# EAGLE board OCTOBOARDV_1.1 (EAGLE 9.5.1)
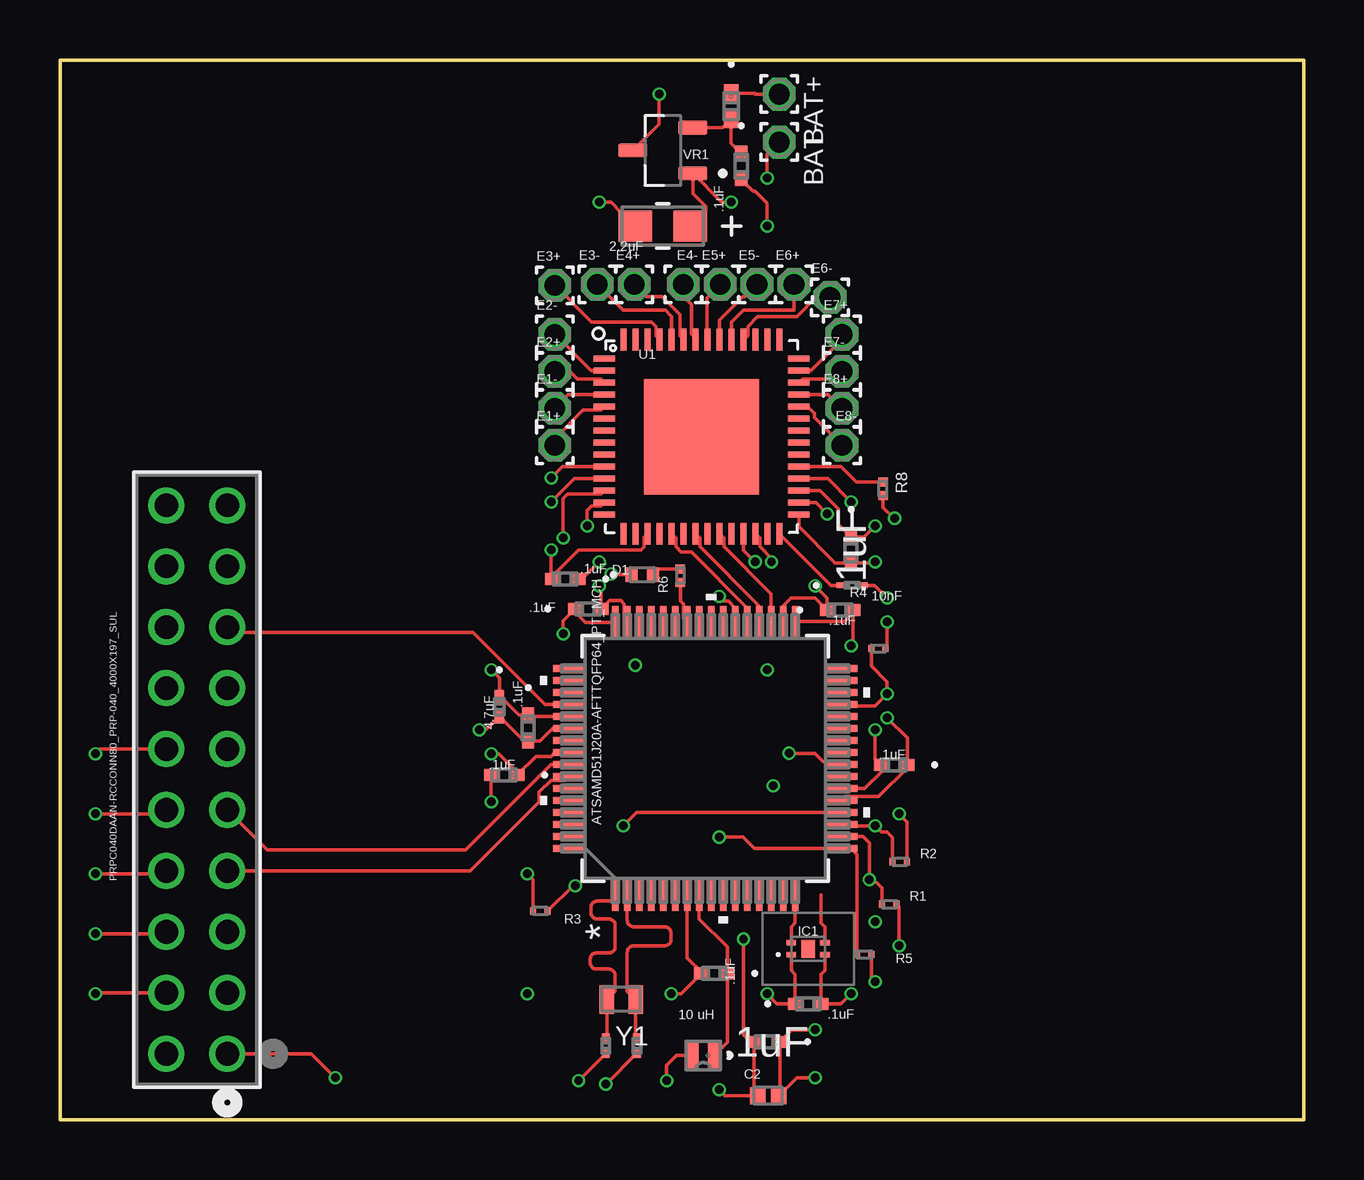
[diagram p0: board, top side]
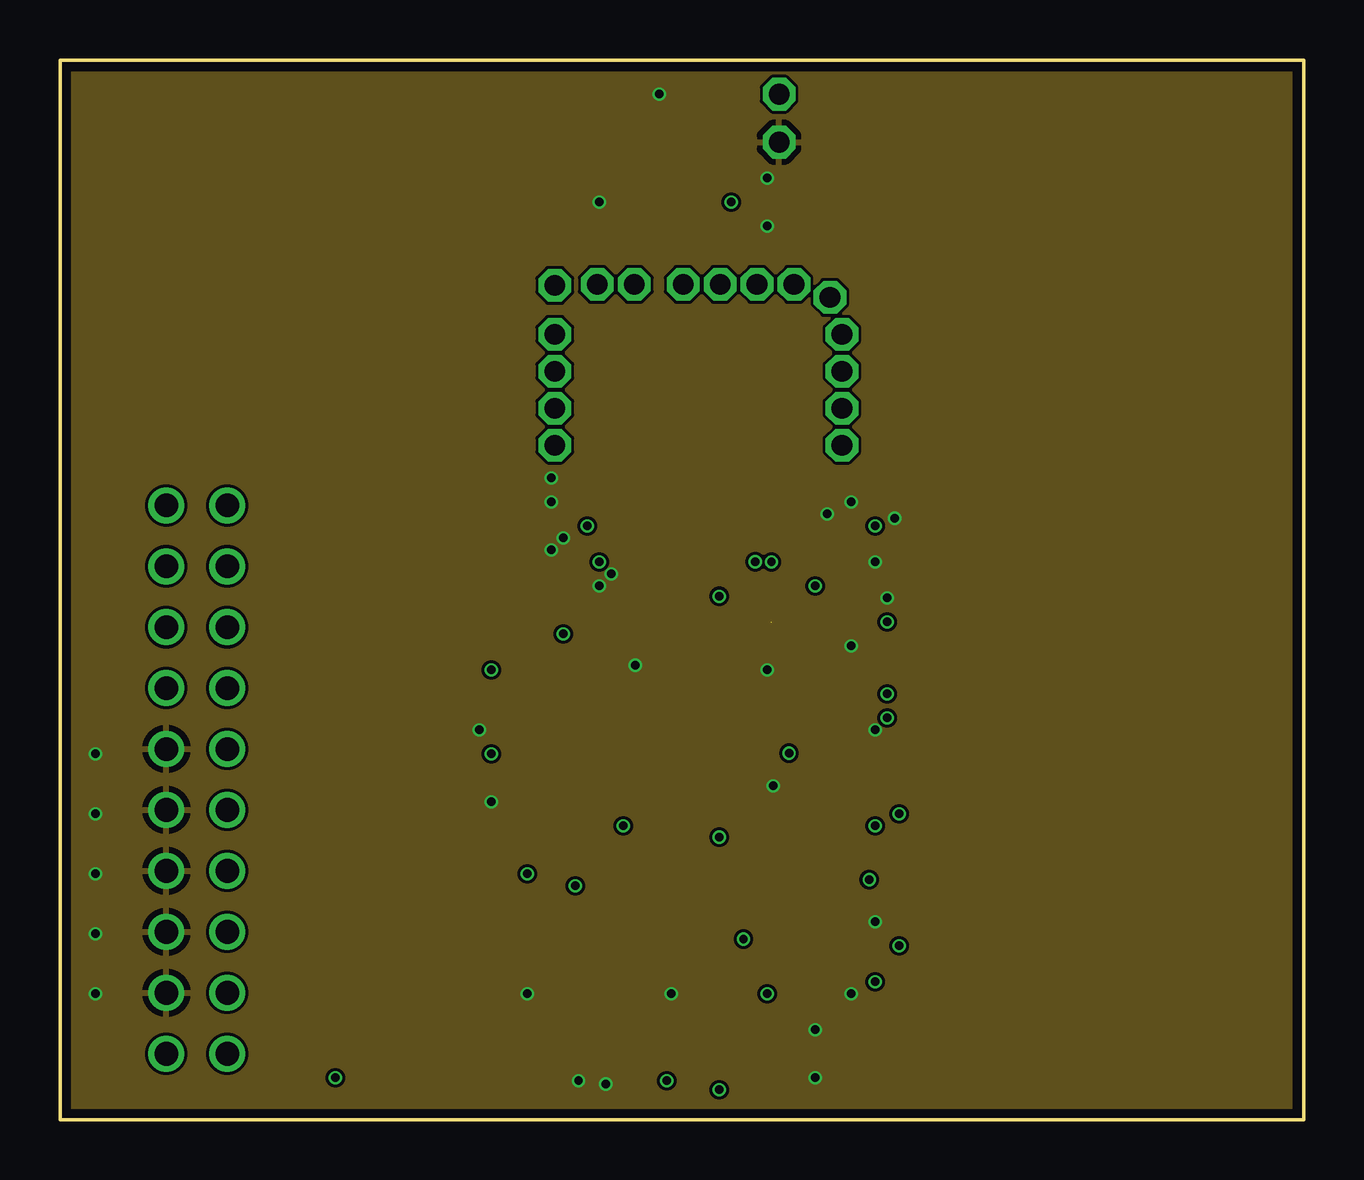
[diagram p1: board, inner layer Route2]
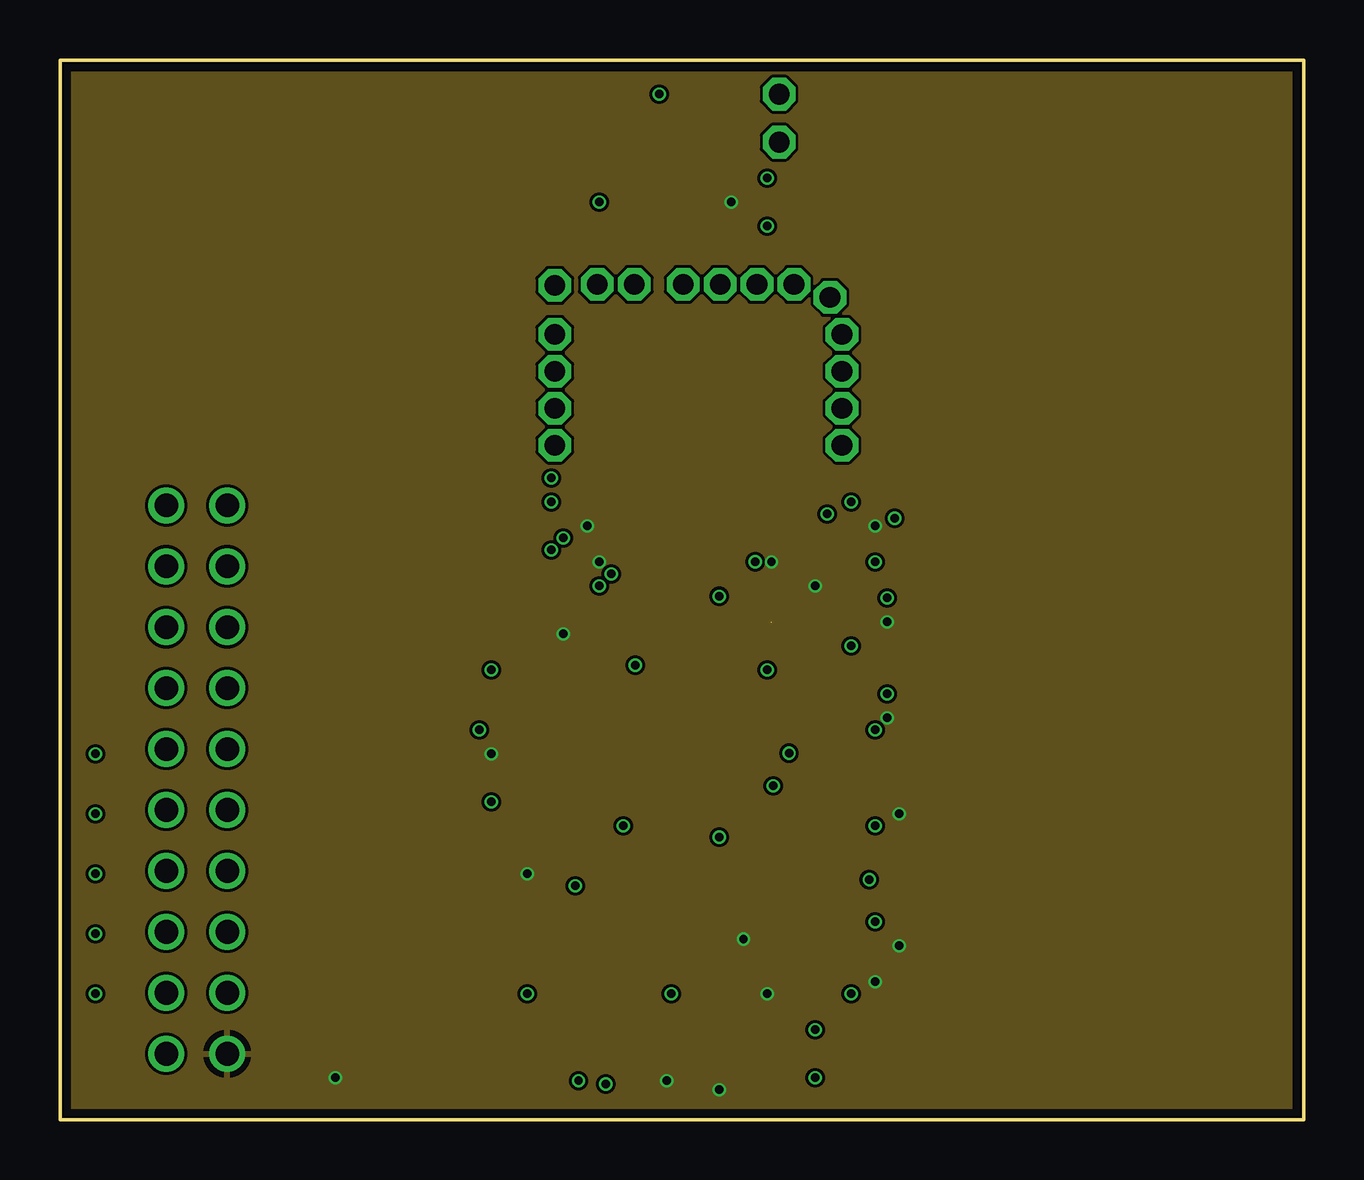
[diagram p2: board, inner layer Route15]
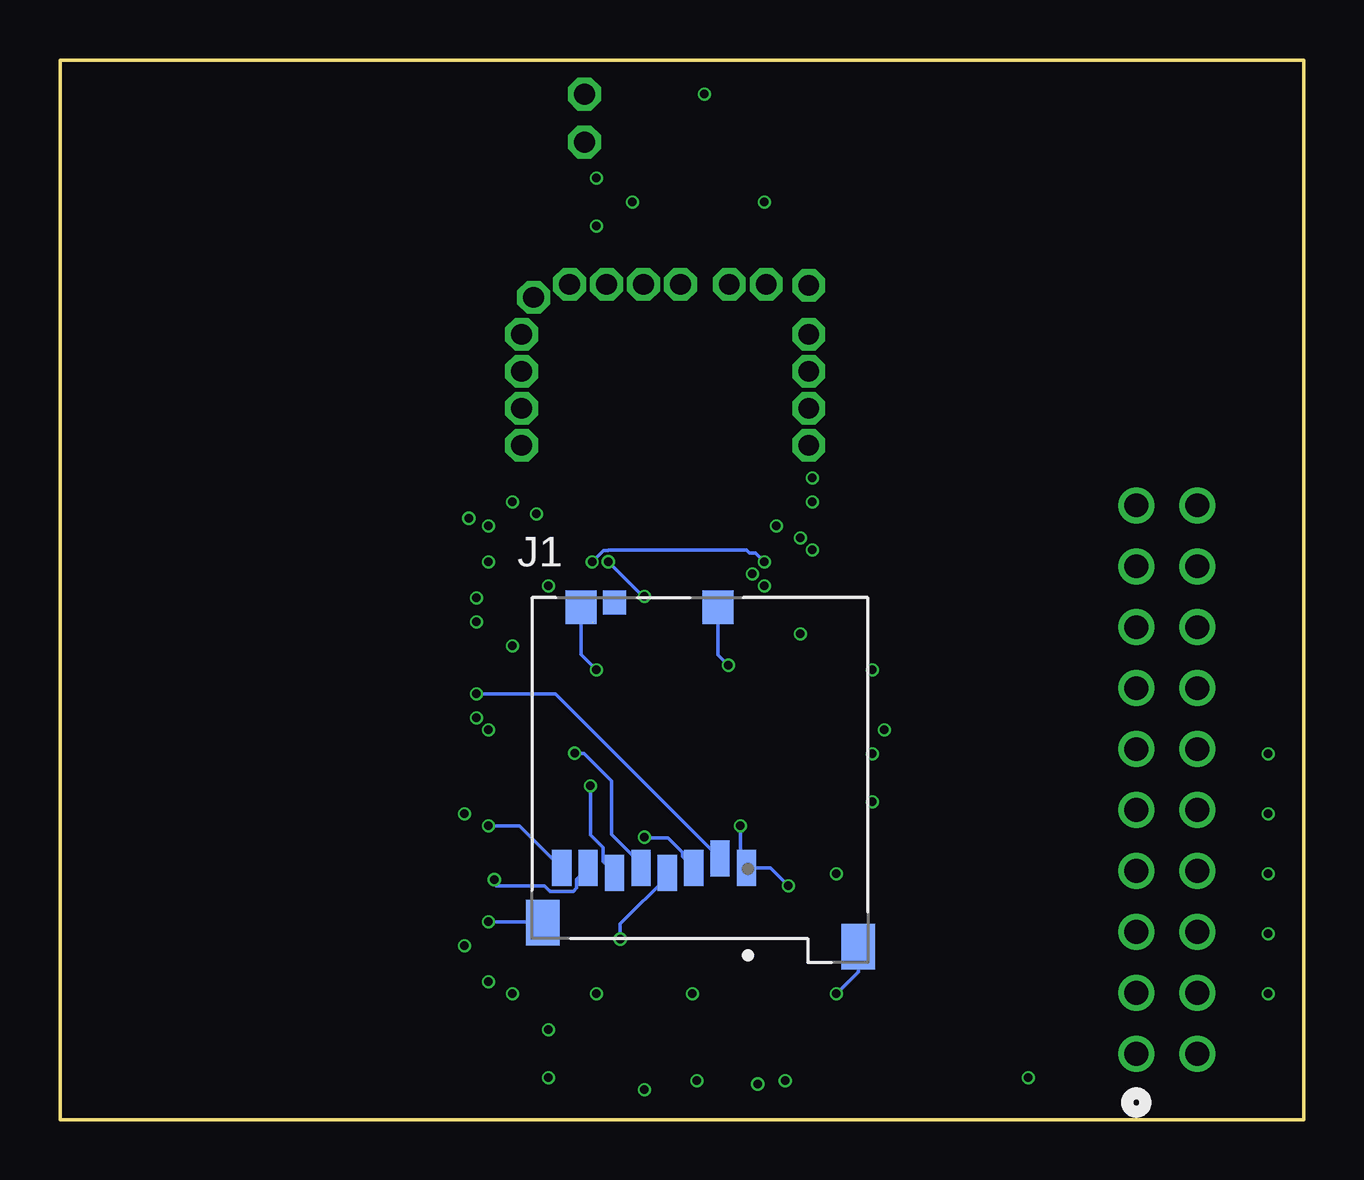
[diagram p3: board, bottom side, seen from below]

Size 51.84 x 44.17 mm. Coordinates in mm from the lower left corner, seen from the top.
Outline: 0,0 0,44.17 51.84,44.17 51.84,0 0,0
Copper layers (1*2*15*16): Top 0.035559375mm / dielectric 0.17018125mm / Route2 0.01778125mm / dielectric 47mil / Route15 0.01778125mm / dielectric 0.17018125mm / Bottom 0.035559375mm
Design rules "oshpark-4layer": minimum track width 5mil, minimum drill 10mil, track to track 5mil, track to pad 5mil, pad to pad 5mil, via to via 5mil, smd to smd 5mil, copper to edge 15mil, drill to drill 6mil, minimum pad ring 4mil, minimum via ring 4mil, stop-mask expansion 1.5mil, vias tented up to drill 0mil, thermal gap 10mil

## Footprints (pad centres in the part's own frame; a part is rotated, then mirrored left to right if it is on the bottom)
1,6/0,9 = drill 0.86 pad 1.36 octagon: 1 0,0
CAP_0402_WAL = smd 0.604 x 0.508: 1 -0.543,0; 2 0.543,0
CAPC1005X70N = smd 0.64 x 0.72: 1 -0.439,0; 2 0.439,0
CAPMP3.4X1.6_1.8N_KEM = smd 1.399 x 1.3: 1 -1.151,0; 2 1.151,0
CAP_00J25AH_AVX = smd 0.502 x 0.229: 1 -0.404,0; 2 0.404,0
CAPC6333_33N_KEM = smd 0.43 x 0.33: 1 -0.3,0; 2 0.3,0
CAP_CM03_F_KAV = smd 0.579 x 0.381: 1 -0.404,0; 2 0.404,0
LED_SML-P11UTT86R = smd 0.5 x 0.6: A 0.45,0; C -0.45,0
0402_AVX = smd 0.756 x 0.61: 1 -0.531,0; 2 0.531,0
MHA100KN = smd 0.4 x 0.22: 1 -0.7,-0.25; 2 0.7,-0.25; 3 0.7,0.25; 4 -0.7,0.25 | smd 0.55 x 0.75: 5 0,0
MOLEX_47352-1001 = smd 0.8 x 1.5: 1 1.94,-3.66; 2 0.84,-3.26; 3 -0.26,-3.66; 4 -1.36,-3.86; 5 -2.46,-3.66; 6 -3.56,-3.86; 7 -4.66,-3.66; 8 -5.76,-3.66 | smd 1.3 x 1.4: S1 -4.95,7.2; S2 0.75,7.2 | smd 1.4 x 1.9: S3 -6.55,-5.95; S4 6.6,-6.95 | smd 0.95 x 1: SW -3.56,7.4
CONN80_PRP-040_4000X197_SUL = drill 0.991 pad 1.499: 1 0,0; 2 -2.54,0; 3 -5.08,0; 4 -7.62,0; 5 -10.16,0; 6 -12.7,0; 7 -15.24,0; 8 -17.78,0; 9 -20.32,0; 10 -22.86,0; 11 0,-2.54; 12 -2.54,-2.54; 13 -5.08,-2.54; 14 -7.62,-2.54; 15 -10.16,-2.54; 16 -12.7,-2.54; 17 -15.24,-2.54; 18 -17.78,-2.54; 19 -20.32,-2.54; 20 -22.86,-2.54
IND_SDEB12101T_CYN = smd 0.508 x 1.194: 1 -0.45,0; 2 0.45,0
RES_ERJ1GNJ104C = smd 0.25 x 0.3: 1 -0.3,0; 2 0.3,0
RES_ERJ-1RHD1002C = smd 0.25 x 0.3: 1 -0.3,0; 2 0.3,0
RESC0603X26N = smd 0.38 x 0.4: 1 -0.281,0; 2 0.281,0
QFN56_8_X_8_LARGE = smd 0.9 x 0.25: 1 -4.05,3.25; 2 -4.05,2.75; 3 -4.05,2.25; 4 -4.05,1.75; 5 -4.05,1.25; 6 -4.05,0.75; 7 -4.05,0.25; 8 -4.05,-0.25; 9 -4.05,-0.75; 10 -4.05,-1.25; 11 -4.05,-1.75; 12 -4.05,-2.25; 13 -4.05,-2.75; 14 -4.05,-3.25; 29 4.05,-3.25; 30 4.05,-2.75; 31 4.05,-2.25; 32 4.05,-1.75; 33 4.05,-1.25; 34 4.05,-0.75; 35 4.05,-0.25; 36 4.05,0.25; 37 4.05,0.75; 38 4.05,1.25; 39 4.05,1.75; 40 4.05,2.25; 41 4.05,2.75; 42 4.05,3.25 | smd 0.25 x 0.9: 15 -3.25,-4.05; 16 -2.75,-4.05; 17 -2.25,-4.05; 18 -1.75,-4.05; 19 -1.25,-4.05; 20 -0.75,-4.05; 21 -0.25,-4.05; 22 0.25,-4.05; 23 0.75,-4.05; 24 1.25,-4.05; 25 1.75,-4.05; 26 2.25,-4.05; 27 2.75,-4.05; 28 3.25,-4.05; 43 3.25,4.05; 44 2.75,4.05; 45 2.25,4.05; 46 1.75,4.05; 47 1.25,4.05; 48 0.75,4.05; 49 0.25,4.05; 50 -0.25,4.05; 51 -0.75,4.05; 52 -1.25,4.05; 53 -1.75,4.05; 54 -2.25,4.05; 55 -2.75,4.05; 56 -3.25,4.05 | smd 4.8 x 4.8: CENTER 0,0
TQFP64_PT_MCH = smd 1.346 x 0.279: 1 -5.677,3.75; 2 -5.677,3.25; 3 -5.677,2.75; 4 -5.677,2.25; 5 -5.677,1.75; 6 -5.677,1.25; 7 -5.677,0.75; 8 -5.677,0.25; 9 -5.677,-0.25; 10 -5.677,-0.75; 11 -5.677,-1.25; 12 -5.677,-1.75; 13 -5.677,-2.25; 14 -5.677,-2.75; 15 -5.677,-3.25; 16 -5.677,-3.75; 33 5.677,-3.75; 34 5.677,-3.25; 35 5.677,-2.75; 36 5.677,-2.25; 37 5.677,-1.75; 38 5.677,-1.25; 39 5.677,-0.75; 40 5.677,-0.25; 41 5.677,0.25; 42 5.677,0.75; 43 5.677,1.25; 44 5.677,1.75; 45 5.677,2.25; 46 5.677,2.75; 47 5.677,3.25; 48 5.677,3.75 | smd 0.279 x 1.346: 17 -3.75,-5.677; 18 -3.25,-5.677; 19 -2.75,-5.677; 20 -2.25,-5.677; 21 -1.75,-5.677; 22 -1.25,-5.677; 23 -0.75,-5.677; 24 -0.25,-5.677; 25 0.25,-5.677; 26 0.75,-5.677; 27 1.25,-5.677; 28 1.75,-5.677; 29 2.25,-5.677; 30 2.75,-5.677; 31 3.25,-5.677; 32 3.75,-5.677; 49 3.75,5.677; 50 3.25,5.677; 51 2.75,5.677; 52 2.25,5.677; 53 1.75,5.677; 54 1.25,5.677; 55 0.75,5.677; 56 0.25,5.677; 57 -0.25,5.677; 58 -0.75,5.677; 59 -1.25,5.677; 60 -1.75,5.677; 61 -2.25,5.677; 62 -2.75,5.677; 63 -3.25,5.677; 64 -3.75,5.677
SOT95P280X110-3N = smd 1.21 x 0.59: 1 -1.255,0.95; 2 -1.255,-0.95; 3 1.255,0
XTAL_CM9V-T1A-32.768KHZ-9PF-20PPM-TA-QC = smd 0.6 x 1.2: 1 -0.6,0; 2 0.6,0

## Placement (x,y rotation side)
BAT+  [1,6/0,9]  29.98,42.75 270 top
BAT-  [1,6/0,9]  29.98,40.75 270 top
C1  .1uF  [CAP_0402_WAL]  29.48,3.25 180 top
C2  10uF  [CAPC1005X70N]  29.52,1 0 top
C3  .1uF  [CAP_0402_WAL]  28.4,39.75 270 top
C4  .1uF  [CAP_0402_WAL]  31.19,4.83 0 top
C5  2.2uF  [CAPMP3.4X1.6_1.8N_KEM]  25.12,37.25 180 top
C6  10nF  [CAP_00J25AH_AVX]  33.02,22.27 0 top
C7  .1uF  [CAP_0402_WAL]  21.07,22.54 180 top
C8  .1uF  [CAP_0402_WAL]  34.77,14.79 180 top
C9  .1uF  [CAP_0402_WAL]  32.98,23.75 270 top
C10  .1uF  [CAP_0402_WAL]  18.52,14.37 180 top
C11  CBR02C130F3GACCAPC6333_33N_KEM  [CAPC6333_33N_KEM]  22.75,3.09 90 top
C12  .1uF  [CAP_0402_WAL]  19.52,16.33 270 top
C13  4.7uF  [CAP_CM03_F_KAV]  18.32,17.22 270 top
C14  .1uF  [CAP_0402_WAL]  22.02,21.29 0 top
C15  CBR02C130F3GACCAPC6333_33N_KEM  [CAPC6333_33N_KEM]  24.05,3.09 90 top
C16  .1uF  [CAP_0402_WAL]  32.52,21.25 0 top
C18  .1uF  [CAP_0402_WAL]  27.27,6.1 180 top
D1  SML-P11UTT86R  [LED_SML-P11UTT86R]  24.27,22.72 0 top
E1+  [1,6/0,9]  20.62,28.12 0 top
E1-  [1,6/0,9]  20.62,29.66 0 top
E2+  [1,6/0,9]  20.62,31.2 0 top
E2-  [1,6/0,9]  20.62,32.74 0 top
E3+  [1,6/0,9]  20.62,34.78 0 top
E3-  [1,6/0,9]  22.4,34.82 0 top
E4+  [1,6/0,9]  23.94,34.82 0 top
E4-  [1,6/0,9]  25.98,34.82 0 top
E5+  [1,6/0,9]  27.52,34.82 0 top
E5-  [1,6/0,9]  29.05,34.82 0 top
E6+  [1,6/0,9]  30.6,34.82 0 top
E6-  [1,6/0,9]  32.1,34.28 0 top
E7+  [1,6/0,9]  32.6,32.74 0 top
E7-  [1,6/0,9]  32.6,31.2 0 top
E8+  [1,6/0,9]  32.6,29.66 0 top
E8-  [1,6/0,9]  32.6,28.12 0 top
FUSE28MA  F0402G0R02FNTR0402_AVX  [0402_AVX]  27.98,42.25 270 top
IC1  MHA100KN  [MHA100KN]  31.19,7.13 0 top
J1  47352-1001  [MOLEX_47352-1001]  25.16,14.16 0 bottom
J2  PRPC040DAAN-RCCONN80_PRP-040_4000X197_SUL  [CONN80_PRP-040_4000X197_SUL]  6.98,2.75 270 top
L1  10 uH  [IND_SDEB12101T_CYN]  26.82,2.68 180 top
R1  100k  [RES_ERJ1GNJ104C]  34.57,8.99 0 top
R2  100k  [RES_ERJ1GNJ104C]  35.01,10.76 0 top
R3  100k  [RES_ERJ1GNJ104C]  20.02,8.7 180 top
R4  100k  [RES_ERJ1GNJ104C]  34.12,19.65 0 top
R5  10k  [RES_ERJ-1RHD1002C]  33.52,6.89 0 top
R6  3.3k  [RESC0603X26N]  25.86,22.68 90 top
R8  0Ohm  [RESC0603X26N]  34.3,26.3 270 top
U1  RHD2216_QFN  [QFN56_8_X_8_LARGE]  26.74,28.47 0 top
U3  ATSAMD51J20A-AFTTQFP64_PT_MCH  [TQFP64_PT_MCH]  26.9,15.06 90 top
VR1  TS5204CX33_RFG  [SOT95P280X110-3N]  25.12,40.4 180 top
Y1  CM9V-T1A-32.768KHZ-9PF-20PPM-TA-QC  [XTAL_CM9V-T1A-32.768KHZ-9PF-20PPM-TA-QC]  23.4,5.01 180 top

## Library data of the parts
BAT+ BAT- E1+ E1- E2+ E2- E3+ E3- E4+ E4- E5+ E5- E6+ E6- E7+ E7- E8+ E8- = wirepadedit
C1 C3 C4 C7-C10 C12 C14 C16 C18 = 01uFCap; COPYRIGHT: Copyright (C) 2023 Ultra Librarian. All rights reserved.; MANUFACTURER_PART_NUMBER: 0402B104K250CT; MFR_NAME: Walsin
C2 = 10uFCap; AVAILABILITY: In Stock; DESCRIPTION: SMD capacitor X5R(EIA) with capacitance 10uF Tol.20%. Rated voltage 10Vdc 85C; MF: Murata Electronics; MP: GRM155R61A106ME11D; PACKAGE: 1005 Murata; PRICE: None; PURCHASE-URL: https://pricing.snapeda.com/search/part/GRM155R61A106ME11D/?ref=eda
C5 = 2_2uFCap; COPYRIGHT: Copyright (C) 2023 Ultra Librarian. All rights reserved.; MANUFACTURER_PART_NUMBER: T491A225K016ATAUTO; MFR_NAME: Kemet
C6 = 10nFCap; COPYRIGHT: Copyright (C) 2023 Ultra Librarian. All rights reserved.; MANUFACTURER_PART_NUMBER: CM02X5R103M16AH; MFR_NAME: KYOCERA AVX
C11 C15 = 13pFCap; COPYRIGHT: Copyright (C) 2023 Ultra Librarian. All rights reserved.; MANUFACTURER_PART_NUMBER: CBR02C130F3GAC; MFR_NAME: Kemet
C13 = 4_7uFCap0603; COPYRIGHT: Copyright (C) 2023 Ultra Librarian. All rights reserved.; MANUFACTURER_PART_NUMBER: CM03X5R475M06AH055; MFR_NAME: KYOCERA AVX
D1 = SML_P11UTT86R; MANUFACTURER: ROHM Semiconductor; PARTREV: 007; STANDARD: Manufacturer Recommendation
FUSE28MA = fuse28mA; COPYRIGHT: Copyright (C) 2023 Ultra Librarian. All rights reserved.; MANUFACTURER_PART_NUMBER: F0402G0R20FNTR; MFR_NAME: KYOCERA AVX
IC1 = MHA100KN; DESCRIPTION: Board Mount Hall Effect / Magnetic Sensors High Performance Low Power Hall-Effect Sensor; HEIGHT: 0.42mm; MANUFACTURER_NAME: MEMSIC; MANUFACTURER_PART_NUMBER: MHA100KN; MOUSER_PART_NUMBER: 438-MHA100KN; MOUSER_PRICE-STOCK: https://www.mouser.co.uk/ProductDetail/MEMSIC/MHA100KN?qs=W%2FMpXkg%252BdQ6cWUMxnX3l5w%3D%3D
J1 = 47352-1001; DESCRIPTION: 8 (6 + 2) Position Card Connector Secure Digital - microSD™ Surface Mount, Right Angle Gold; DIGI-KEY_PART_NUMBER: WM3290CT-ND; MF: Molex; MP: 47352-1001; PACKAGE: None; PURCHASE-URL: https://pricing.snapeda.com/search/part/47352-1001/?ref=eda
J2 = Header; COPYRIGHT: Copyright (C) 2023 Ultra Librarian. All rights reserved.; MANUFACTURER_PART_NUMBER: PRPC040DAAN-RC; MFR_NAME: Sullins; TYPE: Headers, Male Pins
L1 = 10uH_inductor; COPYRIGHT: Copyright (C) 2023 Ultra Librarian. All rights reserved.; MANUFACTURER_PART_NUMBER: SDEB12101T-100MSD; MFR_NAME: Cyntec
R1-R4 = 100kRes; AVAILABILITY: In Stock; DESCRIPTION: 100 kOhms 5% 0.05W, 1/20W Chip Resistor 0201 (0603 Metric) Automotive AEC-Q200 Thick Film; MF: Panasonic; MP: ERJ-1GNJ104C; PACKAGE: 0603-2 Panasonic; PRICE: None; PURCHASE-URL: https://pricing.snapeda.com/search/part/ERJ-1GNJ104C/?ref=eda
R5 = 10kRes; AVAILABILITY: In Stock; DESCRIPTION: 10 kOhms ±0.5% 0.05W, 1/20W Chip Resistor 0201 (0603 Metric) - Thick Film; MF: Panasonic Electronic; MP: ERJ-1RHD1002C; PACKAGE: 201-2 Panasonic; PRICE: None; PURCHASE-URL: https://pricing.snapeda.com/search/part/ERJ-1RHD1002C/?ref=eda
R6 = 3_3kRes
R8 = RMCF0201ZT0R00; AVAILABILITY: In Stock; DESCRIPTION: 0 Ohms Jumper 0.05W, 1/20W Chip Resistor 0201 (0603 Metric) - Thick Film; MF: Stackpole Electronics Inc; MP: RMCF0201ZT0R00; PACKAGE: 0603 Rohm Semiconductor; PRICE: None; PURCHASE-URL: https://pricing.snapeda.com/search/part/RMCF0201ZT0R00/?ref=eda
U1 = RHD2000
U3 = ATSAMD51j20AAFT; COPYRIGHT: Copyright (C) 2023 Ultra Librarian. All rights reserved.; MANUFACTURER_PART_NUMBER: ATSAMD51J20A-AFT; MFR_NAME: Microchip
VR1 = TS5204CX33_RFG_VLTREG; AVAILABILITY: In Stock; DESCRIPTION: 80MA 3.3V ULTRA LOW DROPOUT VOLTAGE REGULATOR; MF: Taiwan Semiconductor Corporation; MP: TS5204CX33 RFG; PACKAGE: SOT-23-3 Taiwan Semiconductor; PRICE: None; PURCHASE-URL: https://pricing.snapeda.com/search/part/TS5204CX33 RFG/?ref=eda
Y1 = CM9V-T1A-32.768KHZ-9PF-20PPM-TA-QC; AVAILABILITY: In Stock; DESCRIPTION: LOW FREQUENCY CRYSTAL; MF: Micro Crystal AG; MP: CM9V-T1A-32.768KHZ-9PF-20PPM-TA-QC; PACKAGE: SMD-2 Micro Crystal; PRICE: None; PURCHASE-URL: https://pricing.snapeda.com/search/part/CM9V-T1A-32.768KHZ-9PF-20PPM-TA-QC/?ref=eda

## Nets
+3V3: C1.2 C2.1 C4.1 C5.1 C7.1 C8.1 C9.1 C10.1 C14.1 C16.1 IC1.1 J1.4 J2.1 L1.2 R1.2 R2.2 R3.2 R4.2 R5.2 U1.13 U1.26 U1.31 U3.21 U3.34 U3.48 U3.56 VR1.1
B+: BAT+.1 FUSE28MA.1
CS: U1.19 U3.37
CTR: U1.CENTER
EXT_INT: IC1.4 U3.16
GND: BAT-.1 C1.1 C2.2 C3.2 C4.2 C5.2 C6.2 C7.2 C8.2 C9.2 C10.2 C11.1 C12.2 C13.2 C14.2 C15.1 C16.2 C18.2 D1.C IC1.2 J1.6 J1.S1 J1.S2 J1.S3 J1.S4 J2.12 J2.13 J2.14 J2.15 J2.16 R8.2 U1.10 U1.11 U1.12 U1.17 U1.29 U1.30 U1.32 U3.7 U3.22 U3.33 U3.47 U3.54 VR1.3
N$1: C3.1 FUSE28MA.2 VR1.2
N$2: E2-.1 U1.2
N$3: E2+.1 U1.3
N$4: E1-.1 U1.4
N$5: E1+.1 U1.5
N$7: E3-.1 U1.52
N$8: E4+.1 U1.51
N$9: E4-.1 U1.50
N$10: E5+.1 U1.49
N$11: E5-.1 U1.48
N$12: E6+.1 U1.47
N$13: E7+.1 U1.41
N$14: E6-.1 U1.46
N$15: E7-.1 U1.40
N$16: E8+.1 U1.39
N$17: E8-.1 U1.38
N$18: R6.1 U3.42
N$19: C6.1 U1.28
N$20: R8.1 U1.33
N$21 [Test]: C11.2 U3.1 Y1.2
N$22: C12.1 C13.1 U3.53
N$23: C18.1 L1.1 U3.8
N$24: D1.A R6.2
N$25 [Test]: C15.2 U3.2 Y1.1
N$26: E3+.1 U1.53
NC: IC1.3
RESET: J2.8 U3.52
SD_CD/DATA3: J1.2 R4.1 U3.29
SDCLK: J1.5 U3.24
SDCMD: J1.3 R5.1 U3.17
SDDATA0: J1.7 R1.1 U3.18
SDDATA1: J1.8 R2.1 U3.19
SDDATA2: J1.1 R3.1 U3.20
SPI_MISO: U1.25 U3.38
SPI_MOSI: U1.23 U3.35
SPI_SCLK: U1.21 U3.36
SWDCLK: J2.5 U3.57
SWDIO: J2.4 U3.58
VSW: U3.55

## Tracks (layer width: path | path; a pad name or v marks a point on that pad's centre or on a via)
+3V3  (via drill 0.35)
  Top 0.152: U1.13 22.55,25.57 22.15,25.57 21.98,25.4 v21.98,24.75 | v33.98,24.75 33.52,24.29 C9.1 32.46,24.81 32.46,25.45 31.68,26.22 U1.31 | v20.98,20.25 20.98,20.79 C14.1 21.47,21.17 21.91,20.74 U3.48 | R1.2 34.98,8.88 v34.98,7.25 | R3.2 19.73,10 v19.48,10.25 | v34.48,20.75 34.48,19.71 R4.2 | v27.48,1.25 27.73,1 C2.1 28.93,1.15 C1.2 28.77,3.25 28.49,3.53 v28.49,7.53 | v25.29,1.62 25.29,2.28 25.69,2.68 L1.2 | v27.98,38.25 27.58,38.25 VR1.1 26.38,38.61 26.93,38.06 26.93,37.89 26.84,37.8 26.82,37.8 C5.1 | J2.1 10.48,2.75 v11.48,1.75 | IC1.1 30.49,6.22 30.65,6.06 30.65,4.88 C4.1 29.89,4.83 v29.48,5.25 | v31.48,22.25 31.97,21.75 C16.1 31.47,21.75 30.48,21.75 30.15,21.42 U3.34 | U1.26 29.17,24.25 29.17,23.89 29.66,23.39 v29.66,23.25 | v22.48,23.25 21.77,22.54 C7.1 | U3.56 20.62,15.31 20.46,15.15 19.84,15.15 C10.1 18.86,14.57 18.86,14.69 18.3,15.25 v17.98,15.25 | v34.48,16.75 35.32,15.91 C8.1 35.32,14.67 34.11,13.47 32.73,13.47 U3.21 | v33.98,5.75 33.82,5.9 R5.2 | v34.98,12.75 35.3,12.42 R2.2
  Bottom 0.152: J1.4 26.52,10.13 28.49,8.16 v28.49,7.53 | v29.66,23.25 29.46,23.45 29.18,23.73 28.99,23.73 28.98,23.75 23.22,23.75 23.1,23.63 22.85,23.63 v22.48,23.25
  pour Route15: 51.98,-0.25 -0.02,-0.25 -0.02,44.25 51.98,44.25
B+
  Top 0.152: FUSE28MA.1 28.94,42.78 28.98,42.75 BAT+.1
CS
  Top 0.152: U1.19 25.67,24.25 25.67,23.89 25.89,23.66 26.32,23.66 28.65,21.34 U3.37
EXT_INT
  Top 0.152: IC1.4 30.49,8.04 30.65,8.2 U3.16
GND  (via drill 0.35)
  Top 0.152: C3.2 28.9,38.71 28.98,38.71 29.48,38.21 v29.48,37.25 | VR1.3 24.98,41.51 v24.98,42.75 | v29.48,39.25 29.48,40.25 BAT-.1 | v20.48,26.75 20.95,27.22 U1.10 | U1.11 21.45,26.72 v20.48,25.75 | U1.12 22.55,26.07 21.15,26.07 20.98,25.9 v20.98,24.25 | v33.98,23.25 33.93,23.21 C9.2 32.31,23.21 30.79,24.72 U1.29 | U1.30 31.51,25.72 v31.98,25.25 | U1.32 32.01,26.72 v32.98,25.75 | R8.2 34.3,25.52 34.75,25.07 v34.8,25.07 | U1.17 24.35,24.27 24.35,23.88 24.22,23.74 23.27,23.74 | 23.27,23.74 23.27,23.75 | U3.7 26.15,6.75 26.78,6.12 26.78,6.05 C18.2 25.88,5.25 v25.48,5.25 | U3.33 30.68,20.77 32.69,20.77 33.06,21.13 C16.2 33.06,19.83 v32.98,19.75 | U3.47 23.51,20.87 23.51,21.5 23.38,21.64 22.91,21.64 C14.2 22.56,22.17 v22.48,22.25 | C10.2 v17.98,13.25 | v17.48,16.25 17.75,16.25 C13.2 19.34,15.79 C12.2 20.01,15.79 20.54,16.31 U3.54 | J2.12 1.52,5.29 v1.48,5.25 | J2.13 4.36,7.75 v1.48,7.75 | J2.14 4.32,10.25 v1.48,10.25 | J2.15 4.27,12.75 v1.48,12.75 | J2.16 1.68,15.45 v1.48,15.25 | C11.1 22.75,2.76 v21.61,1.62 | v22.75,1.49 C15.1 | v31.48,3.75 30.52,3.75 C1.1 30.02,1.05 C2.2 30.71,1.75 v31.48,1.75 | IC1.2 31.89,6.22 31.73,6.06 31.73,4.88 C4.2 32.56,4.83 v32.98,5.25 | C5.2 23.43,37.8 23.41,37.8 22.96,38.25 v22.48,38.25 | 23.27,23.74 21.61,23.74 20.72,22.86 20.72,22.74 C7.2 20.48,22.59 v20.48,23.75 | D1.C 23.01,22.72 v22.98,22.75 | v33.98,16.25 33.98,15.05 C8.2 34.23,14.51 33.54,13.81 U3.22 | C6.2 33.96,22.27 v34.48,21.75
  Bottom 0.152: J1.S2 24.41,19.38 v23.98,18.94 | J1.S1 30.12,19.39 v29.48,18.75 | J1.6 29.2,10.77 29.2,11.34 29.73,11.88 v29.73,13.92 | v19.48,5.25 18.57,6.16 J1.S4 | J1.S3 31.76,8.25 v33.98,8.25
  pour Route2: -0.02,44.25 -0.02,-0.25 51.98,-0.25 51.98,44.25
N$1
  Top 0.152: VR1.2 27.61,41.35 FUSE28MA.2 27.98,40.71 C3.1
N$2
  Top 0.152: E2-.1 22.15,31.22 U1.2
N$3
  Top 0.152: E2+.1 21.23,31.2 21.57,30.87 22.55,30.87 U1.3
N$4
  Top 0.152: E1-.1 21.19,30.22 U1.4
N$5
  Top 0.152: U1.5 22.55,29.57 21.8,29.57 20.62,28.4 E1+.1
N$7
  Top 0.152: E3-.1 23.48,33.75 25.23,33.75 25.5,33.49 U1.52
N$8
  Top 0.152: U1.51 25.85,32.67 25.85,33.56 25.09,34.32 24.44,34.32 E4+.1
N$9
  Top 0.152: E4-.1 25.98,34.33 26.32,33.98 26.32,32.75 26.49,32.58 U1.50
N$10
  Top 0.152: U1.49 26.98,32.54 26.98,34.25 27.54,34.82 E5+.1
N$11
  Top 0.152: U1.48 27.49,33.34 28.48,34.32 28.55,34.32 E5-.1
N$12
  Top 0.152: U1.47 27.99,33.25 28.49,33.75 30.6,33.75 E6+.1
N$13
  Top 0.152: E7+.1 32.6,32.52 31.29,31.22 U1.41
N$14
  Top 0.152: U1.46 28.67,32.69 28.67,33.05 29.08,33.47 30.71,33.47 31.52,34.28 E6-.1
N$15
  Top 0.152: U1.40 30.94,30.87 32.26,30.87 E7-.1
N$16
  Top 0.152: U1.39 32.01,30.22 32.58,29.65 E8+.1
N$17
  Top 0.152: E8-.1 31.45,29.27 31.45,29.43 31.16,29.72 U1.38
N$18
  Top 0.152: U3.42 25.99,20.89 25.99,21.49 25.86,21.63 R6.1
N$19
  Top 0.152: C6.1 32.15,22.27 U1.28
N$20
  Top 0.152: U1.33 32.56,27.22 33.2,26.58 R8.1
N$21
  Top 0.152: U3.1 arc-90 22.88,9.12 22.4,9.12 arc90 22.13,8.85 22.13,8.64 arc90 22.4,8.37 22.88,8.37 arc-90 23.15,8.1 23.15,7.22 arc-90 22.88,6.95 22.37,6.95 arc90 22.1,6.69 22.1,6.55 arc90 22.37,6.28 22.88,6.28 arc-90 23.15,6.01 23.15,5.36 Y1.2 22.8,3.43 C11.2
N$22  (via drill 0.35)
  Top 0.152: U3.53 19.58,16.81 C12.1 19.13,16.87 18.57,17.44 18.5,17.44 C13.1 18.32,18.41 v17.98,18.75
N$23
  Top 0.152: U3.8 26.65,8.38 27.82,7.21 C18.1 27.82,3.23 L1.1
N$24
  Top 0.152: R6.2 24.97,22.96 D1.A
N$25
  Top 0.152: U3.2 23.65,8.31 arc90 23.91,8.04 25.2,8.04 arc-90 25.47,7.78 25.47,7.52 arc-90 25.2,7.25 23.91,7.25 arc90 23.65,6.99 23.65,5.36 Y1.1 24,3.44 C15.2
N$26
  Top 0.152: U1.53 24.85,32.67 24.85,33.06 24.66,33.25 22.16,33.25 E3+.1
NC
  Top 0.152: IC1.3 31.88,8.04 31.72,8.2 31.72,9.38
RESET
  Top 0.152: U3.52 20.22,17.31 17.22,20.31 7.2,20.31 J2.8
SD_CD/DATA3  (via drill 0.35)
  Top 0.152: U3.29 32.63,17.25 33.98,17.25 v34.48,17.75 34.48,18.25 33.82,18.91 R4.1
  Bottom 0.152: J1.2 31.18,17.75 v34.48,17.75
SDCLK  (via drill 0.35)
  Top 0.152: U3.24 32.66,14.81 32.53,14.94 31.8,14.94 31.47,15.27 v30.39,15.27
  Bottom 0.152: J1.5 27.63,10.67 28.84,11.89 28.84,14.11 30,15.27 v30.39,15.27
SDCMD  (via drill 0.35)
  Top 0.152: v27.48,11.78 28.48,11.78 28.95,11.31 U3.17 32.98,11.31 33.23,11.06 R5.1
  Bottom 0.152: J1.3 25.9,10.97 25.9,11.14 26.5,11.75 27.48,11.75 v27.48,11.78
SDDATA0  (via drill 0.35)
  Top 0.152: U3.18 33.48,11.81 33.74,11.55 v33.74,10.01 34.03,9.89 34.27,9.66 R1.1
  Bottom 0.152: J1.7 30.3,10.03 30.3,9.66 30.43,9.52 31.42,9.52 31.65,9.75 33.67,9.75 v33.74,10.01
SDDATA1  (via drill 0.35)
  Top 0.152: U3.19 32.63,12.25 v33.98,12.25 34.24,11.99 34.48,11.99 34.71,11.76 R2.1
  Bottom 0.152: J1.8 32.68,12.25 v33.98,12.25
SDDATA2  (via drill 0.35)
  Top 0.152: v23.48,12.25 24.04,12.81 U3.20 | R3.1 21.38,9.75 v21.48,9.75
  Bottom 0.152: v23.48,12.25 23.48,10.75 J1.1 22.23,10.5 v21.48,9.75
SPI_MISO  (via drill 0.35)
  Top 0.152: U1.25 28.49,23.74 v28.98,23.25 | v27.48,21.81 27.68,21.61 27.87,21.61 28.15,21.34 U3.38
  Bottom 0.152: v28.98,23.25 27.54,21.81 v27.48,21.81
SPI_MOSI  (1 unrouted)
  Top 0.152: 27.49,24.18 U1.23 27.67,24.25 27.67,23.89 29.65,21.91 U3.35
SPI_SCLK
  Top 0.152: U1.21 26.67,24.25 26.67,23.89 29.15,21.41 U3.36
SWDCLK
  Top 0.152: U3.57 20.48,14.81 16.91,11.25 8.63,11.25 J2.5
SWDIO
  Top 0.152: U3.58 21.06,14.15 20.46,14.15 19.98,13.67 19.98,13.25 17.09,10.37 J2.4